# Altium PCB PCB1.PcbDoc (part 2 of 2)
Units mm, origin at the board's own origin, x right, y up, seen from the top; angles counter-clockwise.
Board outline 192 x 86 mm, 2 copper layers (Top Layer, Bottom Layer), stack 1.671 mm thick; 53 components, 94 nets, 298 pads, 93 vias.
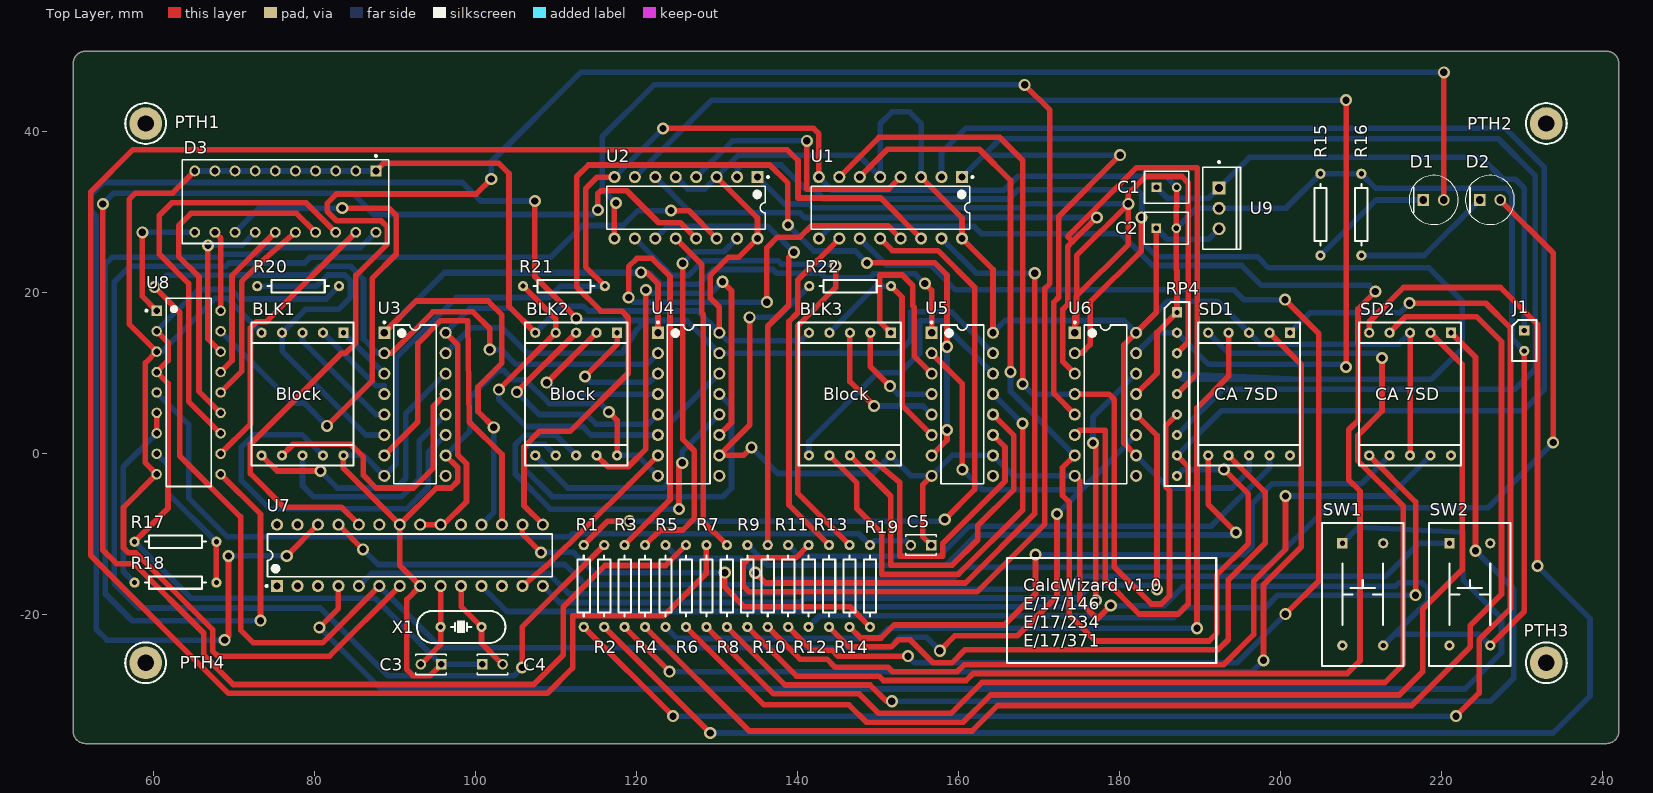
[diagram p0: Top Layer view]

## Via types
v1: diameter 1.5, hole 0.9, Top Layer to Bottom Layer, 93 vias

## Nets (pads, with @x,y where several pads share a name; then routed paths per layer and width w, separated by ;. In a path a pad name is that pad's centre, name@x,y a point inside that pad or via, vN(x,y) a via of type N, cw(c..) or ccw(c..) an arc to the next point about the centre after c; other vN are vias at no path point) (continued)
NetU3_15: U3.15 U4.15 U5.15 U7.26 | length 257.1
  Top Layer w0.7: v1(68.809,-23.186) 69.291,-22.703 v1(69.291,-12.721) ; v1(76.519,-12.721) U7.26 ; v1(107.34,31.373) 107.34,21.95 v1(112.497,16.794)
  Bottom Layer w0.7: v1(68.809,-23.186) 54.17,-23.186 52.857,-21.873 52.857,29.485 52.17,30.172 52.17,32.11 53.72,33.659 98.323,33.659 100.609,31.373 v1(107.34,31.373) ; v1(69.291,-12.721) v1(76.519,-12.721) ; U3.15 99.438,15.638 103.24,15.638 106.418,12.46 118.17,12.46 120.04,15.422 121.133,16.514 ; v1(112.497,16.794) 112.776,16.514 121.133,16.514 ; U5.15 159.12,17.6 154.04,17.6 154.04,14.1 152.4,12.46 U4.15 126.206,16.514 121.133,16.514
NetU4_7: U4.7 U7.13 | length 23.4
  Top Layer w0.7: U7.13 108.78,-13.971 119.101,-3.779 U4.7
NetU5_7: U5.7 U7.15 | length 134.5
  Top Layer w0.7: U7.15 105.994,-6.494 105.994,0.817 107.95,2.773 111.76,2.773 118.948,9.961 118.948,16.87 118.135,17.683 115.545,17.683 112.547,20.68 112.547,34.396 113.995,35.844 136.525,35.844 138.786,33.583 v1(138.786,28.376) ; v1(148.615,23.677) 157.048,23.677 158.547,22.179 v1(158.547,13.263) ; U5.7 158.547,1.667 v1(158.547,2.925)
  Bottom Layer w0.7: v1(138.786,28.376) 142.011,25.15 147.142,25.15 v1(148.615,23.677) ; v1(158.547,2.925) v1(158.547,13.263)
NetU6_12: U6.12 U7.14 | length 101.1
  Top Layer w0.7: U6.12 184.635,2.245 v1(184.635,-16.912)
  Bottom Layer w0.7: U7.14 110.395,-18.515 140.315,-18.515 140.875,-17.955 174.901,-17.955 176.505,-16.352 184.075,-16.352 v1(184.635,-16.912)
NetU6_14: U6.14 U7.11 | length 108.7
  Top Layer w0.7: v1(176.682,1.3) 177.038,0.944 v1(177.038,-18.258)
  Bottom Layer w0.7: U7.11 103.89,-19.63 141.415,-19.63 141.99,-19.055 176.241,-19.055 v1(177.038,-18.258) ; v1(176.682,1.3) 176.682,4.562 U6.14
VCC: BLK1.5 BLK2.5 BLK3.5 C2.1 D3.1 D3.2 D3.3 D3.4 D3.5 D3.6 D3.7 D3.8 D3.9 D3.10 SD1.3 SD1.8 SD2.3 SD2.8 U1.3 U1.5 U1.16 U2.3 U2.5 U2.16 U3.16 U4.16 U5.16 U6.10 U6.16 U7.7 U7.20 U7.21 U8.3 U8.9 U9.3 | length 490.9
  Top Layer w0.7: D3.10 62.34,32.34 57.734,32.34 56.945,31.55 56.945,16.078 U8.3 58.953,11.251 58.953,-1.171 U8.9 56.235,-6.707 56.235,-11.705 56.875,-12.345 57.771,-12.345 67.309,-21.883 67.309,-24.532 67.945,-25.168 81.852,-25.168 U7.7 ; D3.1 88.547,36.047 102.87,36.047 104.14,34.777 104.14,18.26 BLK2.5 ; U7.21 U7.20 96.01,-8.84 98.86,-5.99 98.86,-1.275 97.765,-0.18 97.765,13.495 U3.16 ; U2.3 135.01,29.26 U2.16 132.653,24.363 131.354,24.363 129.158,22.167 129.158,19.283 130.26,18.181 U4.16 ; U1.3 160.41,29.26 U1.16 164.26,22.87 U5.16 ; U6.10 180.518,1.282 180.518,13.478 U6.16 184.54,17.5 C2.1 ; SD2.8 SD2.3
  Bottom Layer w0.7: U8.3 61.027,12.66 67.625,19.258 69.142,19.258 BLK1.5 ; D3.10 D3.9 D3.8 D3.7 D3.6 D3.5 D3.4 D3.3 D3.2 D3.1 ; U7.21 U7.20 ; U3.16 99.295,18.035 104.365,18.035 BLK2.5 110.694,18.294 113.409,18.294 114.004,17.699 127.561,17.699 U4.16 131.231,14.029 140.429,14.029 BLK3.5 ; U2.5 126.369,32.821 128.411,32.821 U2.3 132.664,37.074 147.516,37.074 U1.5 150.25,41 151.698,42.448 153.882,42.448 155.33,41 U1.3 ; U5.16 165.774,16.514 180.526,16.514 U6.16 185.967,18.927 192.153,18.927 SD1.3 197.496,13.584 214.664,13.584 SD2.3 ; U6.10 186.08,-4.28 193.953,-4.28 196.08,-2.152 SD1.8 ; C2.1 185.906,26.624 191.054,26.624 U9.3
pads on no net: PTH1.1 PTH2.1 PTH3.1 PTH4.1 SD1.10 SD2.10 SW1.2 SW1.4 SW2.2 SW2.4 U3.9 U4.9 U5.9 U6.9 U7.1 U7.2 U7.3 U7.12 U7.19 U7.23 U7.27 U7.28

## Polygon pours and split planes (outlines as drawn)
no net on Layer0 "Default Coverlay 1 Top" (split plane): 50,50 242,50 242,-35.97 50,-35.97
no net on Layer0 "Default Coverlay 1 Bottom" (split plane): 50,49.97 242,49.97 242,-36 50,-36

## Silkscreen, mask and mechanical layers (free items; w line width, h text height)
Top Overlay:
  lines w0.254: 166,-26 192,-26 192,-13 166,-13 166,-26
  text "CalcWizard v1.0 / E/17/146 / E/17/234 / E/17/371" at 168,-24 h1.52
Board Outline:
  lines w0.254: 50,-35.746 ccw(c50.254,-35.746) 50.254,-36 241.746,-36 ccw(c241.746,-35.746) 242,-35.746 242,49.746 ccw(c241.746,49.746) 241.746,50 50.254,50 ccw(c50.254,49.746) 50,49.746 50,-35.746
Enclosure:
  lines w0.254: 42,7.5 250,7.5 ; 59.5,-49 59.5,64 232.5,64 232.5,-48.998 59.5,-48.998 ; 146,-56 146,72 ; 51,-28.5 241,-28.5 241,43.5 51,43.5 51,-28.5
Mechanical 13:
  lines w0.254: 50,-34.53 ccw(c51.5,-34.53) 51.5,-36.03 ; 50,-34.53 ccw(c51.5,-34.53) 51.5,-36.03 ; 50,-34.53 50,48.47 ; 50,-34.53 50,48.47 ; 50,48.47 cw(c51.5,48.47) 51.5,49.97 ; 50,48.47 cw(c51.5,48.47) 51.5,49.97 ; 51.5,-36.03 240.5,-36.03 ; 51.5,-36.03 240.5,-36.03 ; 51.5,49.97 240.5,49.97 ; 51.5,49.97 240.5,49.97 ; 240.5,-36.03 ccw(c240.5,-34.53) 242,-34.53 ; 240.5,-36.03 ccw(c240.5,-34.53) 242,-34.53 ; 240.5,49.97 cw(c240.5,48.47) 242,48.47 ; 240.5,49.97 cw(c240.5,48.47) 242,48.47 ; 242,-34.53 242,48.47 ; 242,-34.53 242,48.47

## Text inside footprints (layer, text, board x,y; h text height)
BLK1: Top Overlay "Block" at 75.179,6.618 h1.52
BLK2: Top Overlay "Block" at 109.179,6.618 h1.52
BLK3: Top Overlay "Block" at 143.179,6.618 h1.52